# EAGLE board MovingTargetUnit_v2 (EAGLE 9.6.2)

Size 73.33 x 31.74 mm. Coordinates in mm from the lower left corner, seen from the top.
Outline: 0,0 73.33,0 73.33,31.74 0,31.74 0,0
Copper layers (1*16): Top 0.035mm / dielectric 1.5mm / Bottom 0.035mm
Design rules "default": minimum track width 6mil, minimum drill 0.35mm, track to track 6mil, track to pad 6mil, pad to pad 6mil, via to via 6mil, smd to smd 6mil, copper to edge 40mil, drill to drill 6mil, minimum pad ring 10mil, minimum via ring 8mil, stop-mask expansion 4mil, vias tented up to drill 0mil, thermal gap 10mil

## Footprints (pad centres in the part's own frame; a part is rotated, then mirrored left to right if it is on the bottom)
JST-XH_098_VERT_1X6 = drill 1 square: 1 6.25,0 | drill 1: 2 3.75,0; 3 1.25,0; 4 -1.25,0; 5 -3.75,0; 6 -6.25,0
PINHDR_TH_100_1X2 = drill 1: 1 -1.27,0; 2 1.27,0
PINHDR_TH_100_1X3 = drill 1: 1 -2.54,0; 2 0,0; 3 2.54,0
LED_1206 = smd 0.9 x 1.7: ANODE(+) -1.45,0; CATHODE(-) 1.45,0
ESP8266_MODULE = drill 0.9: P$1 0,0; P$2 2.54,0; P$3 5.08,0; P$4 7.62,0; P$5 10.16,0; P$6 12.7,0; P$7 15.24,0; P$8 17.78,0; P$9 20.32,0; P$10 22.86,0; P$11 25.4,0; P$12 27.94,0; P$13 30.48,0; P$14 33.02,0; P$15 35.56,0; P$16 35.56,22.86; P$17 33.02,22.86; P$18 30.48,22.86; P$19 27.94,22.86; P$20 25.4,22.86; P$21 22.86,22.86; P$22 20.32,22.86; P$23 17.78,22.86; P$24 15.24,22.86; P$25 12.7,22.86; P$26 10.16,22.86; P$27 7.62,22.86; P$28 5.08,22.86; P$29 2.54,22.86; P$30 0,22.86 | hole 3.175: -4.064,21.946; -4.064,0.889; 39.624,21.946; 39.624,0.914
ARDUINO-NANO = drill 1: 3.3 0,-2.54; 5V 0,-27.94; A0 0,-7.62; A1 0,-10.16; A2 0,-12.7; A3 0,-15.24; A4 0,-17.78; A5 0,-20.32; A6 0,-22.86; A7 0,-25.4; D2 15.24,-25.4; D3 15.24,-22.86; D4 15.24,-20.32; D5 15.24,-17.78; D6 15.24,-15.24; D7 15.24,-12.7; D8 15.24,-10.16; D9 15.24,-7.62; D10 15.24,-5.08; D11 15.24,-2.54; D12 15.24,0; GND 0,-33.02; GND2 15.24,-27.94; REF 0,-5.08; RST 0,-30.48; RST2 15.24,-30.48; RX 15.24,-33.02; TX 15.24,-35.56; VIN 0,-35.56 | drill 1 square: D13 0,0
DC_DC_MODULE = drill 1 square: IN+ 0,17.348; IN- 0,0; OUT+ 39.954,17.348; OUT- 39.954,0 | hole 3.175: 34.95,0.711; 4.978,16.739
TRIMPOT_SIP_100 = drill 0.75: P$1 0,0; P$2 2.54,0; P$3 5.08,0
R1206 = smd 0.9 x 1.7: P$1 -1.45,0; P$2 1.45,0
TO-92 = drill 0.6: P$1 0,0; P$2 2.54,0; P$3 5.08,0
SO16LNB-14PIN = smd 1.75 x 0.65: P$1 0,0; P$2 0,-1.27; P$3 0,-2.54; P$4 0,-3.81; P$5 0,-5.08; P$6 0,-6.35; P$7 0,-7.62; P$8 5.6,-7.62; P$9 5.6,-6.35; P$10 5.6,-5.08; P$11 5.6,-3.81; P$12 5.6,-2.54; P$13 5.6,-1.27; P$14 5.6,0

## Placement (x,y rotation side)
J1  PINHDR_1X6-XH  [JST-XH_098_VERT_1X6]  68.58,10.16 90 top
J2  PINHDR_1X6-XH  [JST-XH_098_VERT_1X6]  59.69,10.16 90 top
J3  PINHDR_1X2-100  [PINHDR_TH_100_1X2]  54.61,27.94 180 top
J4  PINHDR_1X3-100  [PINHDR_TH_100_1X3]  67.31,22.86 0 top
J5  PINHDR_1X3-100  [PINHDR_TH_100_1X3]  67.31,29.21 0 top
LED1  IR Emitter LED  [LED_1206]  15.24,43.18 0 top  (outside the outline)
M1  ESP8266_MODULE  [ESP8266_MODULE]  7.62,29.21 180 bottom
M2  ARDUINO-NANO  [ARDUINO-NANO]  7.62,10.16 90 top
M3  DC_DC_MODULE  [DC_DC_MODULE]  52.07,20.32 180 top
P1  10K  [TRIMPOT_SIP_100]  2.54,2.54 0 top
R1  100  [R1206]  26.67,43.18 90 top  (outside the outline)
R2  3K  [R1206]  29.21,20.32 90 top
R3  2K  [R1206]  35.56,20.32 90 top
R4  10K  [R1206]  35.56,13.97 90 top
R5  10K  [R1206]  24.13,13.97 90 top
R6  10K  [R1206]  29.21,13.97 90 top
R7  10K  [R1206]  22.86,20.32 90 top
T1  T_NPN  [TO-92]  5.08,43.18 0 top  (outside the outline)
U1  [SO16LNB-14PIN]  3.81,21.59 0 top

## Library data of the parts
J1-J5 LED1 M1-M3 P1 R1-R7 T1 U1 = Dal_V2

## Nets
+5V: M2.5V P1.P$3 R4.P$2 R5.P$2 R6.P$2 R7.P$2 U1.P$4
BATV: M1.P$16 M2.A0 R2.P$1 R3.P$2
GND: J1.1 J1.2 J2.1 J2.2 J3.2 J4.3 J5.3 LED1.CATHODE(-) M1.P$2 M1.P$9 M1.P$25 M1.P$29 M2.GND M2.GND2 M3.IN- M3.OUT- P1.P$1 R3.P$1 T1.P$3 U1.P$11
IRD_1: M2.D4 U1.P$7
IRD_2: M2.D5 U1.P$14
IRD_3: M2.D6 U1.P$8
IRD_4: M2.D7 U1.P$1
IRE_1: J2.6 M2.D2
IRE_2: J2.5 M2.D3
IRE_3: J2.4 M2.D8
IRE_4: J2.3 M2.D9
N$3: M2.3.3 M2.REF
N$5: J1.6 R4.P$1 U1.P$5
N$6: J1.5 R5.P$1 U1.P$12
N$7: J1.4 R6.P$1 U1.P$10
N$8: J1.3 R7.P$1 U1.P$3
N$9: R1.P$2
N$10: LED1.ANODE(+) R1.P$1
N$11: P1.P$2 U1.P$2 U1.P$6 U1.P$9 U1.P$13
N$13: T1.P$1
NEO_DATA_1: J4.1 M1.P$14
NEO_DATA_2: J5.1 M1.P$15
NEO_PWR: J4.2 J5.2 M3.OUT+
SPI_CLK: M1.P$8 M2.D13
SPI_CS: M1.P$5 M2.D10
SPI_MISO: M1.P$7 M2.D12
SPI_MOSI: M1.P$6 M2.D11
VIN: J3.1 M1.P$30 M2.VIN M3.IN+ R2.P$2

## Tracks (layer width: path | path; a pad name or v marks a point on that pad's centre or on a via)
+5V  (6 unrouted)
BATV  (3 unrouted)
GND  (19 unrouted)
IRD_1  (1 unrouted)
IRD_2  (1 unrouted)
IRD_3  (1 unrouted)
IRD_4  (1 unrouted)
IRE_1  (1 unrouted)
IRE_2  (1 unrouted)
IRE_3  (1 unrouted)
IRE_4  (1 unrouted)
N$3  (1 unrouted)
N$5  (2 unrouted)
N$6  (2 unrouted)
N$7  (2 unrouted)
N$8  (2 unrouted)
N$10  (1 unrouted)
N$11  (4 unrouted)
NEO_DATA_1  (1 unrouted)
NEO_DATA_2  (1 unrouted)
NEO_PWR  (2 unrouted)
SPI_CLK  (1 unrouted)
SPI_CS  (1 unrouted)
SPI_MISO  (1 unrouted)
SPI_MOSI  (1 unrouted)
VIN  (4 unrouted)